# EAGLE board E-Piano-SM (EAGLE 9.4.0)
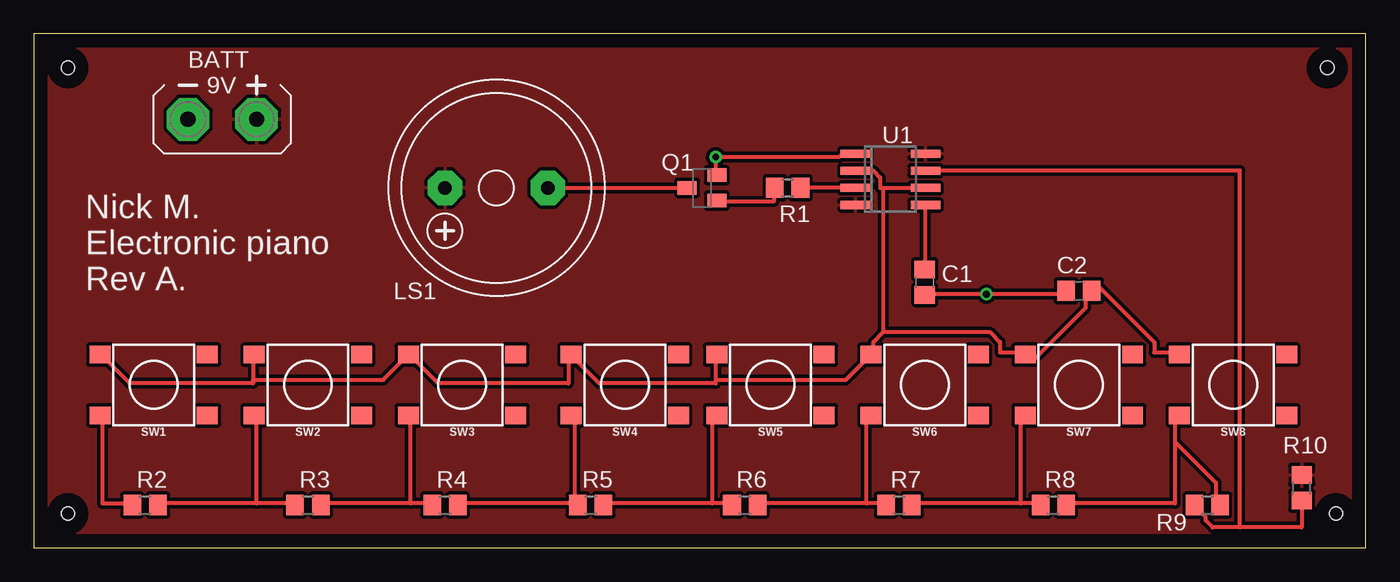
[diagram p0: board, top side]
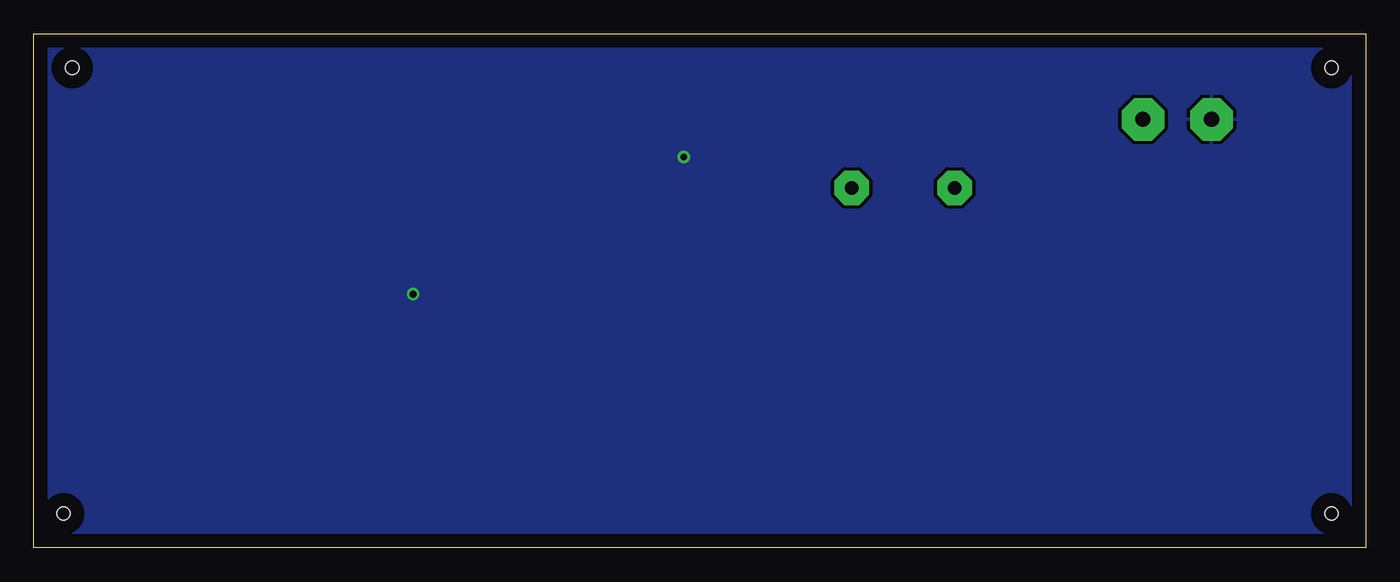
[diagram p1: board, bottom side, seen from below]

Size 98.73 x 38.09 mm. Coordinates in mm from the lower left corner, seen from the top.
Outline: 0,0 98.73,0 98.73,38.09 0,38.09 0,0
Copper layers (1*16): Top 0.035mm / dielectric 1.5mm / Bottom 0.035mm
Design rules "default": minimum track width 6mil, minimum drill 0.35mm, track to track 6mil, track to pad 6mil, pad to pad 6mil, via to via 6mil, smd to smd 6mil, copper to edge 40mil, drill to drill 6mil, minimum pad ring 10mil, minimum via ring 8mil, stop-mask expansion 4mil, vias tented up to drill 0mil, thermal gap 10mil
Net classes: 0 default: width 0.305 mm, drill 0.508 mm, clearance 0.254 mm
Holes 1 mm at 2.54,35.56 2.54,2.54 95.89,35.56 96.52,2.54

## Footprints (pad centres in the part's own frame; a part is rotated, then mirrored left to right if it is on the bottom)
AB9V = drill 1.118 pad 3.15 octagon: + 0,2.54; - 0,-2.54
C0805 = smd 1.3 x 1.5: 1 -0.95,0; 2 0.95,0
F/HMB = drill 1.016 pad 2.54 octagon: + 3.81,0; - -3.81,0
SOT23-BEC = smd 1 x 1.4: B -0.95,-1.1; C 0,1.1; E 0.95,-1.1
R0805 = smd 1.3 x 1.5: 1 -0.95,0; 2 0.95,0
TACTILE_SWITCH_SMD_6.2MM_TALL = smd 1.55 x 1.3: A1 -3.975,-2.25; A2 3.975,-2.25; B1 -3.975,2.25; B2 3.975,2.25
SO08 = smd 0.6 x 2.2: 1 -1.905,-2.6; 2 -0.635,-2.6; 3 0.635,-2.6; 4 1.905,-2.6; 5 1.905,2.6; 6 0.635,2.6; 7 -0.635,2.6; 8 -1.905,2.6

## Placement (x,y rotation side)
BATT  AB9V  [AB9V]  13.97,31.75 270 top
C1  0.1uF  [C0805]  66.04,19.68 270 top
C2  0.1uF  [C0805]  77.47,19.05 180 top
LS1  [F/HMB]  34.29,26.67 180 top
Q1  BCW66  [SOT23-BEC]  49.53,26.67 90 top
R1  3K  [R0805]  55.88,26.67 0 top
R2  1.5K  [R0805]  8.26,3.17 0 top
R3  1.3K  [R0805]  20.32,3.17 0 top
R4  620  [R0805]  30.48,3.17 0 top
R5  1.1K  [R0805]  41.27,3.17 0 top
R6  1K  [R0805]  52.7,3.17 0 top
R7  910  [R0805]  64.14,3.17 0 top
R8  390  [R0805]  75.56,3.17 0 top
R9  6.2K  [R0805]  87,3.17 0 top
R10  1K  [R0805]  93.98,4.45 90 top
SW1  MOMENTARY-SWITCH-SPST-SMD-6.2MM-TALL  [TACTILE_SWITCH_SMD_6.2MM_TALL]  8.89,12.06 180 top
SW2  MOMENTARY-SWITCH-SPST-SMD-6.2MM-TALL  [TACTILE_SWITCH_SMD_6.2MM_TALL]  20.32,12.06 180 top
SW3  MOMENTARY-SWITCH-SPST-SMD-6.2MM-TALL  [TACTILE_SWITCH_SMD_6.2MM_TALL]  31.75,12.06 180 top
SW4  MOMENTARY-SWITCH-SPST-SMD-6.2MM-TALL  [TACTILE_SWITCH_SMD_6.2MM_TALL]  43.81,12.06 180 top
SW5  MOMENTARY-SWITCH-SPST-SMD-6.2MM-TALL  [TACTILE_SWITCH_SMD_6.2MM_TALL]  54.61,12.06 180 top
SW6  MOMENTARY-SWITCH-SPST-SMD-6.2MM-TALL  [TACTILE_SWITCH_SMD_6.2MM_TALL]  66.04,12.06 180 top
SW7  MOMENTARY-SWITCH-SPST-SMD-6.2MM-TALL  [TACTILE_SWITCH_SMD_6.2MM_TALL]  77.47,12.06 180 top
SW8  MOMENTARY-SWITCH-SPST-SMD-6.2MM-TALL  [TACTILE_SWITCH_SMD_6.2MM_TALL]  88.9,12.06 180 top
U1  NE555D  [SO08]  63.5,27.3 270 top

## Library data of the parts
BATT = battery; MOUSER#: 534-81-8TB; MPN: 81-8; OC_NEWARK: unknown
C1 C2 = rcl; MOUSER#: 603-CC805JRX7R9BB104; MPN: CC805JRX7R9BB104; OC_NEWARK: unknown; SPICEPREFIX: C
LS1 = buzzer; MOUSER#: 665-AST-01508MR-R; OC_FARNELL: unknown; OC_NEWARK: unknown
Q1 = transistor; MF: FAIRCHILD SEMICONDUCTOR; MOUSER#: 726-BCW66KHE6327HTSA; MPN: PN2222ATF; OC_NEWARK: 58K2048
R1 R6 R10 = rcl; MOUSER#: 652-CR0805FX-1001ELF; OC_NEWARK: unknown; SPICEPREFIX: R
R2 = rcl; MOUSER#: 652-CR0805FX-1501ELF; OC_NEWARK: unknown; SPICEPREFIX: R
R3 = rcl; MOUSER#: 652-CR0805JW-132ELF; OC_NEWARK: unknown; SPICEPREFIX: R
R4 = rcl; MOUSER#: 652-CR0805JW-621ELF; OC_NEWARK: unknown; SPICEPREFIX: R
R5 = rcl; MOUSER#: 652-CR0805FX-1101ELF; OC_NEWARK: unknown; SPICEPREFIX: R
R7 = rcl; MOUSER#: 652-CR0805FX-9100ELF; OC_NEWARK: unknown; SPICEPREFIX: R
R8 = rcl; MOUSER#: 652-CR0805JW-391ELF; OC_NEWARK: unknown; SPICEPREFIX: R
R9 = rcl; MOUSER#: 652-CR0805FX-6201ELF; OC_NEWARK: unknown; SPICEPREFIX: R
SW1-SW8 = SparkFun-Switches; MOUSER#: 693-1301.9317; MPN: 1301.9317; OC_NEWARK: unknown; PROD_ID: SWCH-11966; SF_SKU: COM-12992
U1 = linear; MOUSER#: 595-TLC555CDR; OC_NEWARK: unknown

## Nets
0: BATT.- C1.2 C2.2 Q1.E U1.1
N$1: R8.2 R9.2 SW8.B2
N$2: R9.1 R10.1 U1.7
N$3: R2.1 SW1.B2
N$4: R7.2 R8.1 SW7.B2
N$5: R6.2 R7.1 SW6.B2
N$6: R5.2 R6.1 SW5.B2
N$7: R4.2 R5.1 SW4.B2
N$8: R3.2 R4.1 SW3.B2
N$9: R2.2 R3.1 SW2.B2
N$11: R1.2 U1.3
N$12: C1.1 U1.5
N$13: LS1.- Q1.C
N$14: Q1.B R1.1
TR: C2.1 SW1.A2 SW2.A2 SW3.A2 SW4.A2 SW5.A2 SW6.A2 SW7.A2 SW8.A2 U1.2 U1.6
VCC: BATT.+ LS1.+ R10.2 U1.4 U1.8

## Tracks (layer width: path | path; a pad name or v marks a point on that pad's centre or on a via)
0  (via drill 0.51)
  Top 0.305: C1.2 66.04,18.8 v70.61,18.8 76.45,18.8 76.45,19.05 C2.2 | Q1.E 50.55,27.69 v50.55,28.96 59.69,28.96 59.94,29.21 U1.1
  pour Bottom: -0.64,-1.27 99.06,-1.27 100.33,0 100.33,38.1 99.06,39.37 0,39.37 -1.27,38.1 -1.27,-0.64
N$1
  Top 0.305: 84.58,7.87 84.58,9.4 84.84,9.65 SW8.B2 | 84.58,7.87 84.58,3.3 76.71,3.3 R8.2 | 84.58,7.87 87.63,4.83 87.63,3.56 87.88,3.3 R9.2
N$2
  Top 0.305: 89.41,1.52 93.98,1.52 R10.1 | 89.41,1.52 87.38,1.52 86.87,2.03 86.87,2.29 86.11,3.05 R9.1 | U1.7 89.41,27.94 89.41,1.52
N$3
  Top 0.305: R2.1 7.11,3.3 5.08,3.3 5.08,9.65 SW1.B2
N$4
  Top 0.305: 73.15,3.3 74.42,3.3 R8.1 | 73.15,3.3 65.28,3.3 R7.2 | 73.15,3.3 73.15,9.4 73.41,9.65 SW7.B2
N$5
  Top 0.305: 61.72,3.3 62.99,3.3 R7.1 | 61.72,3.3 53.85,3.3 R6.2 | 61.72,3.3 61.72,9.4 61.98,9.65 SW6.B2
N$6
  Top 0.305: 50.29,3.3 51.56,3.3 R6.1 | 50.29,3.3 42.42,3.3 R5.2 | 50.29,3.3 50.29,9.4 50.55,9.65 SW5.B2
N$7
  Top 0.305: 40.13,3.3 31.5,3.3 R4.2 | 40.13,3.3 40.13,9.4 39.88,9.65 SW4.B2 | 40.13,3.3 R5.1
N$8
  Top 0.305: 27.94,3.3 29.46,3.3 R4.1 | 27.94,3.3 21.34,3.3 R3.2 | 27.94,3.3 27.94,9.65 SW3.B2
N$9
  Top 0.305: 16.51,3.3 19.3,3.3 R3.1 | 16.51,3.3 9.4,3.3 R2.2 | 16.51,3.3 16.51,9.65 SW2.B2
N$11
  Top 0.305: U1.3 R1.2
N$12
  Top 0.305: C1.1 66.04,25.4 U1.5
N$13
  Top 0.305: LS1.- Q1.C
N$14
  Top 0.305: Q1.B 50.8,25.65 54.86,25.65 54.86,26.67 R1.1
TR
  Top 0.305: 16.26,12.45 16.26,14.22 SW2.A2 | 16.26,12.45 16.26,12.19 7.11,12.19 5.08,14.22 SW1.A2 | 16.26,12.45 25.91,12.45 27.69,14.22 SW3.A2 27.94,14.22 29.97,12.19 39.62,12.19 39.62,14.22 SW4.A2 39.88,14.22 41.91,12.19 50.55,12.19 50.55,12.45 | SW8.A2 84.84,14.48 83.06,14.48 83.06,15.24 78.99,19.3 78.49,19.3 78.49,19.05 C2.1 78.23,19.05 77.98,18.8 77.98,17.78 74.17,13.97 73.66,13.97 73.66,14.22 SW7.A2 73.41,14.48 71.63,14.48 71.63,15.24 70.87,16 62.99,16 | 62.99,26.67 62.74,26.67 62.74,27.43 62.23,27.94 U1.2 | 62.99,26.67 U1.6 | 50.55,12.45 50.55,14.22 SW5.A2 | 50.55,12.45 60.2,12.45 61.98,14.22 SW6.A2 62.23,14.48 62.23,15.24 62.99,16 | 62.99,16 62.99,26.67
VCC
  pour Top: -0.64,-0.64 99.69,-0.64 99.69,38.73 -0.64,38.73

## Text on the board
tPlace: Nick M. / Electronic piano / Rev A.